# Altium PCB Charger_Board.PcbDoc
Units mil, origin at the board's own origin, x right, y up, seen from the top; angles counter-clockwise.
Board outline 6000 x 4000 mil, 2 copper layers (Top Layer, Bottom Layer); 19 components, 24 nets, 79 pads, 0 vias.
Unrouted connection lines stored in the file: 44.
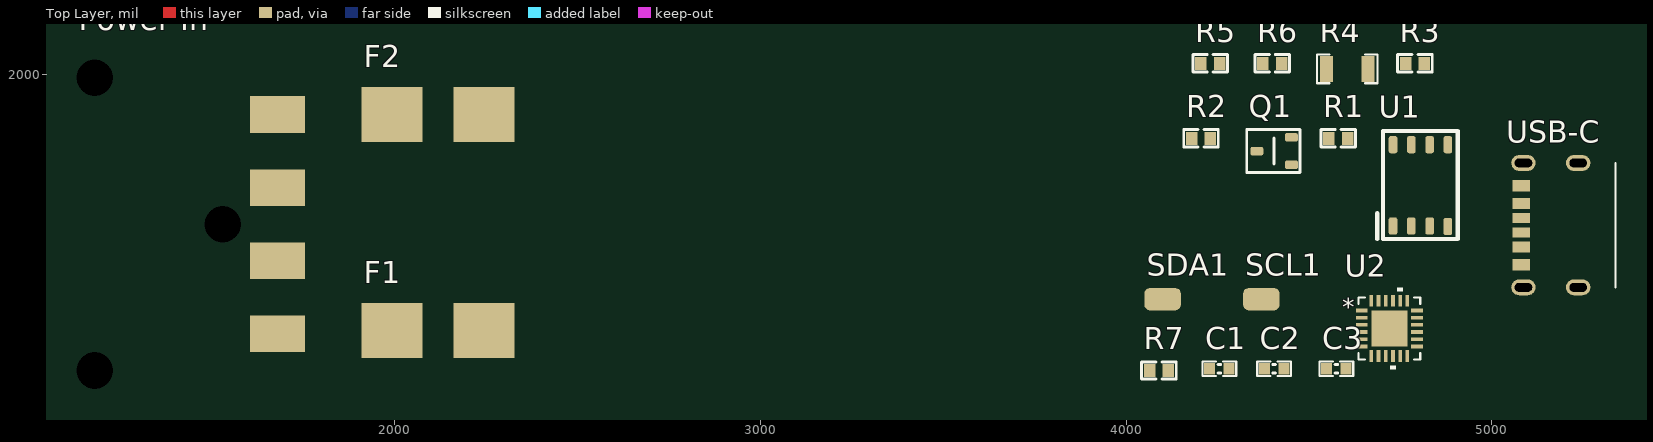
[diagram p0: Top Layer view]
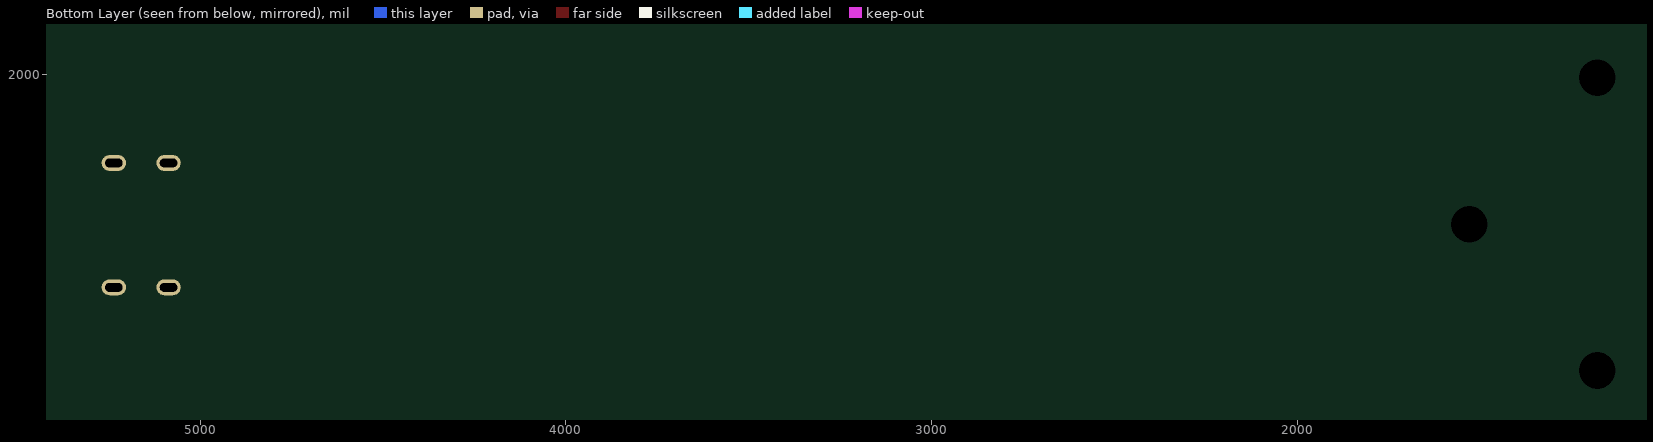
[diagram p1: Bottom Layer view, seen from below]

## Layer stack, top to bottom
Top Solder: solder mask 0.4, Solder Resist, Dk 3.5
Top Layer: signal copper 1.4
Dielectric 1: dielectric 12.6, FR-4, Dk 4.8
Bottom Layer: signal copper 1.4
Bottom Solder: solder mask 0.4, Solder Resist, Dk 3.5

## Board outline
1000,1000 7000,1000 7000,5000 1000,5000

## Design rules (kind name [scope] priority, off if disabled: settings)
Clearance [All] p1: gap=10 ignorepadtopadclearanceinfootprint=FALSE except(0: Arc-Hole Track-Hole SMDPad-Hole THPad-Hole Via-Hole Fill-Hole Poly-Hole Region-Hole Text-Hole)
PolygonConnect [All] p1: connectstyle=Relief reliefconductorwidth=10 reliefentries=4 polygonreliefangle="90 Angle" airgapwidth=10
RoutingVias [All] p1: holewidth=28 width=50 viastyle="Through Hole" minholewidth=28 minwidth=50 maxholewidth=28 maxwidth=50
SolderMaskExpansion [All] p1: expansion=4 istentingtop=FALSE
Width [All] p1: maxlimit=10 minlimit=10 preferedwidth=10
30 further rules are at their usual default settings.

## Components (designator, comment, footprint, x,y, rotation, side; value= is the part's Value field where it differs from the comment)
C1 "1uF" C0603 4255,1195 r0 top value=100pF
C2 "1uF" C0603 4405,1195 r0 top value=100pF
C3 "1uF" C0603 4575,1195 r0 top value=100pF
F1 "0154010.DR" 0154010.DR 1993.31,1299.21 r0 top value=0R
F2 "0154010.DR" 0154010.DR 1993.31,1889.76 r0 top value=0R
"Power In" "c-770149-1-c-3d" c-770149-1-c-3d 1530,1590 r90 top
Q1 "str2p3llh6" SOT23-3 4405,1790 r0 top
R1 "47K" RES0603R 4580,1825 r0 top value=0R
R2 "10K" RES0603R 4205,1825 r0 top value=0R
R3 "22K" RES0603R 4790,2030 r0 top value=0R
R4 "820R" RES1206R 4605,2015 r0 top value=0R
R5 "10K" RES0603R 4230,2030 r0 top value=0R
R6 "10K" RES0603R 4400,2030 r0 top value=0R
R7 "100K" RES0603R 4090,1190 r0 top value=0R
SCL1 "DNP" "smd tp" 4370,1385 r90 top
SDA1 "DNP" "smd tp" 4100,1385 r90 top
U1 "Si4925DDY" si4925dd 4730,1585 r0 top
U2 "STUSB4710AQTR" STUSB4710AQTR 4720,1305 r0 top
USB-C "TYPE-C-31-M-17" TYPE-C-31-M-17 5086.61,1587.4 r90 top

## Footprints (in the part's own frame and the unit in brackets; to place one, negate y for a bottom-side part, rotate by r counter-clockwise, add the part's x,y. Pads: shape width x height; smd on the part's side, far side on the other; paste and mask are expansions set on the pad)
0154010.DR [mm] "10A Fuse"
  rect 4.24x3.81 smd: 1(0,0) 2(6.37,0)
  body extent -1.66,-2.51 8.07,2.52, height 3.81
C0603 [mm]
  rect 0.75x0.8 smd: 1(-0.675,0) 2(0.675,0)
  silkscreen extent -1.17,-0.5 1.17,0.5, body extent -0.8,-0.44 0.8,0.43, height 0.8
c-770149-1-c-3d [mil] "4 Pin drive power SMD"
  rect 100x150 smd: 1(300,-150) 2(100,-150) 3(-100,-150) 4(-300,-150)
  round 60 hole 100 unplated: 7(-400,350) 7(0,0) 7(400,350)
  body extent -500,-201 500,404, height 348
RES0603R [mm] "resistor 0603 reflow soldering"
  rect 0.8x0.9 smd: 1(-0.65,0) 2(0.65,0)
  silkscreen extent -1.2,-0.6 1.2,0.6, body extent -0.8,-0.4 0.8,0.4, height 0.45
RES1206R [mm]
  rect 0.9x1.8 smd: 1(-1.45,0) 2(1.45,0)
  silkscreen extent -2.1,-1 2.1,1, body extent -1.5,-0.77 1.6,0.78, height 0.55
si4925dd [mil] "Dual Mosfet"
  rrect50% 23.58x47.01 smd: 1(0,0) 2(50,0) 3(100,0) 4(150,-1.2) 5(100,222.48) 5(150,222.48) 7(0,222.48) 7(50,222.48)
  silkscreen extent -43,-35 177,260, body extent -22,-6 171,230, height 69
"smd tp" [mm]
  rrect50% 1.54x2.54 smd: 1(0,0)
SOT23-3 [mm] "SOT23, 5-Leads, Body 2.95x2.80mm, Pitch 0.95mm, IPC High Density"
  rrect50% 0.9x0.6 smd: 1(1.2,-0.95) 2(-1.2,0) 3(1.2,0.95)
  silkscreen extent -1.9,-1.5 1.8,1.5, body extent -1.42,-1.5 1.42,1.5, height 1.2
STUSB4710AQTR [mm]
  rect 0.808x0.255 smd paste+0 mask+0: 1(-1.915,1.25) 2(-1.915,0.75) 3(-1.915,0.25) 4(-1.915,-0.25) 5(-1.915,-0.75) 6(-1.915,-1.25) 13(1.915,-1.25) 14(1.915,-0.75) 15(1.915,-0.25) 16(1.915,0.25) 17(1.915,0.75) 18(1.915,1.25)
  rect 0.255x0.808 smd paste+0 mask+0: 7(-1.25,-1.915) 8(-0.75,-1.915) 9(-0.25,-1.915) 10(0.25,-1.915) 11(0.75,-1.915) 12(1.25,-1.915) 19(1.25,1.915) 20(0.75,1.915) 21(0.25,1.915) 22(-0.25,1.915) 23(-0.75,1.915) 24(-1.25,1.915)
  rect 2.5x2.5 smd paste-1.384 mask+0: 25(0,0)
  silkscreen extent -2.15,-2.83 2.15,2.83, body extent -2.02,-2.02 2.02,2.02, height 0.99
TYPE-C-31-M-17 [mm]
  oval 1.1x1.7 hole 1.2 slot 0.6 at 0 deg: 1(-4.32,-3.8) 1(-4.32,0) 1(4.32,-3.8) 1(4.32,0)
  rect 0.8x1.2 smd: 1(-2.75,0.15) 1(2.75,0.15)
  rect 0.76x1.2 smd: 2(-1.52,0.15) 2(1.52,0.15)
  rect 0.7x1.2 smd: 3(-0.5,0.15) 4(0.5,0.15)
  silkscreen extent -4.32,-6.4 4.32,-6.4, body extent -4.5,-6.45 4.45,1.45, height 3.16

## Part data
C1 C2 C3: library part CAP, "Capacitor", Published=8-Jun-2000, Publisher="Altium Limited", Revision="July-2002: Re-released for DXP Platform."
F1 F2: "Polymeric PTC Resettable Fuse 6V 750mA Ih Surface Mount 1206 (3216 Metric), Concave", Part Number=R0201-0R, Part number IPS=00000003245, Supplier Part Number 1=MF-NSMF075-2CT-ND, Artikkelnr Noca=N.A., ComponentLink1Description=Datasheet, ComponentLink2Description="Supplier link", Footprint Doc=0201, LatestRevisionDate=2017-11-09, Note="Chip Res 5%", Pin Count=2, Published=2014-11-13, Publisher="Nordic Semiconductor", Supplier 1=Digi-Key
"Power In": library part "4 Pin connector", "Generic 4 pin connector, see footprint for MPN"
Q1: library part Transistor, "N-Channel 20V 100mA _Ta_ 150mW _Ta_ Surface Mount VMT3", Package="SOT-723 Rohm", Digi-Key_Part_Number=RUM001L02T2CLCT-ND, Digi-Key_Purchase_URL=https://www.digikey.com/product-detail/en/rohm-semiconductor/RUM001L02T2CL/RUM001L02T2CLCT-ND/4571412?utm_source=snapeda&utm_medium=aggregator&utm_campaign=symbol, MF=Rohm, MP=RUM001L02T2CL, SnapEDA_Link=https://www.snapeda.com/parts/RUM001L02T2CL/Rohm/view-part/531428/?ref=snap
R1 R2 R3 R4 R5 R6 R7: "Resistor, ±5%, 0.05W", Part Number=R0201-0R, Part number IPS=00000003245, Artikkelnr Noca=N.A., ComponentLink1Description=Datasheet, ComponentLink2Description="Supplier link", Footprint Doc=0201, LatestRevisionDate=2017-11-09, Note="Chip Res 5%", Pin Count=2, Published=2014-11-13, Publisher="Nordic Semiconductor"
SCL1 SDA1: library part TP
U1: "Si4925DDY, dual mosfet"
U2: "No Description Available", Built_By=EMA_Cory, Copyright="Copyright (C) 2018 Accelerated Designs. All rights reserved", Datasheet=https://www.st.com/resource/en/datasheet/stusb4710.pdf, Manufacturer_Part_Number=STUSB4710AQTR, RefDes=RefDes, SourceLibrary=Add_to_database_2020-12-21, Type=DEV, Vendor=STMicroelectronics
USB-C: "Usb C power connector", Manufacturer Part Number=TYPE-C-31-M-17

## Nets (pads, with @x,y where several pads share a name; then routed paths per layer and width w, separated by ;. In a path a pad name is that pad's centre, name@x,y a point inside that pad or via, vN(x,y) a via of type N, cw(c..) or ccw(c..) an arc to the next point about the centre after c; other vN are vias at no path point)
1V2: C1.2 U2.21
2V7: C2.2 U2.23
3V3: R5.2 R6.2
5V: F1.2
12V: F2.2
CC1: U2.2 USB-C.3
CC2: U2.4 USB-C.4
GND: "Power In.2" "Power In.3" C1.1 C2.1 C3.1 R4.1 R7.1 U2.10 U2.25 USB-C.1
NetF1_1: "Power In.4" F1.1
NetF2_1: "Power In.1" F2.1
NetQ1_1: Q1.1 R2.1 U2.19
NetQ1_2: Q1.2 R4.2
NetR1_1: R1.1 R3.2 U1.2 U1.4
NetR1_2: R1.2 U1.1 U1.3
NetR3_1: R3.1 U2.20
NetR7_2: R7.2 U2.13
SCL: R6.1 SCL1.1 U2.7
SDA: R5.1 SDA1.1 U2.8
SEL_PDO2: U2.12
SEL_PDO3: U2.11
SEL_PDO4: U2.14
SEL_PDO5: U2.15
VOUT: C3.2 Q1.3 R2.2 U1.5 U2.24
VUSB: U1.7 U2.18 USB-C.2
pads on no net: "Power In.7" U2.1 U2.3 U2.5 U2.6 U2.9 U2.16 U2.17 U2.22

## Text inside footprints (layer, text, board x,y; h text height)
U2: Top Overlay "*" at 4591.19,1339.06 h50; Mechanical 13 "*" at 4648,1339.06 h50